# Altium PCB KEYPAD_OLED.PcbDoc
Units mil, origin at the board's own origin, x right, y up, seen from the top; angles counter-clockwise.
Board outline 4903.94 x 4427.17 mil, 2 copper layers (Top Layer, Bottom Layer), stack 59.4 mil thick; 21 components, 18 nets, 129 pads, 7 vias.
Unrouted connection lines stored in the file: 11.
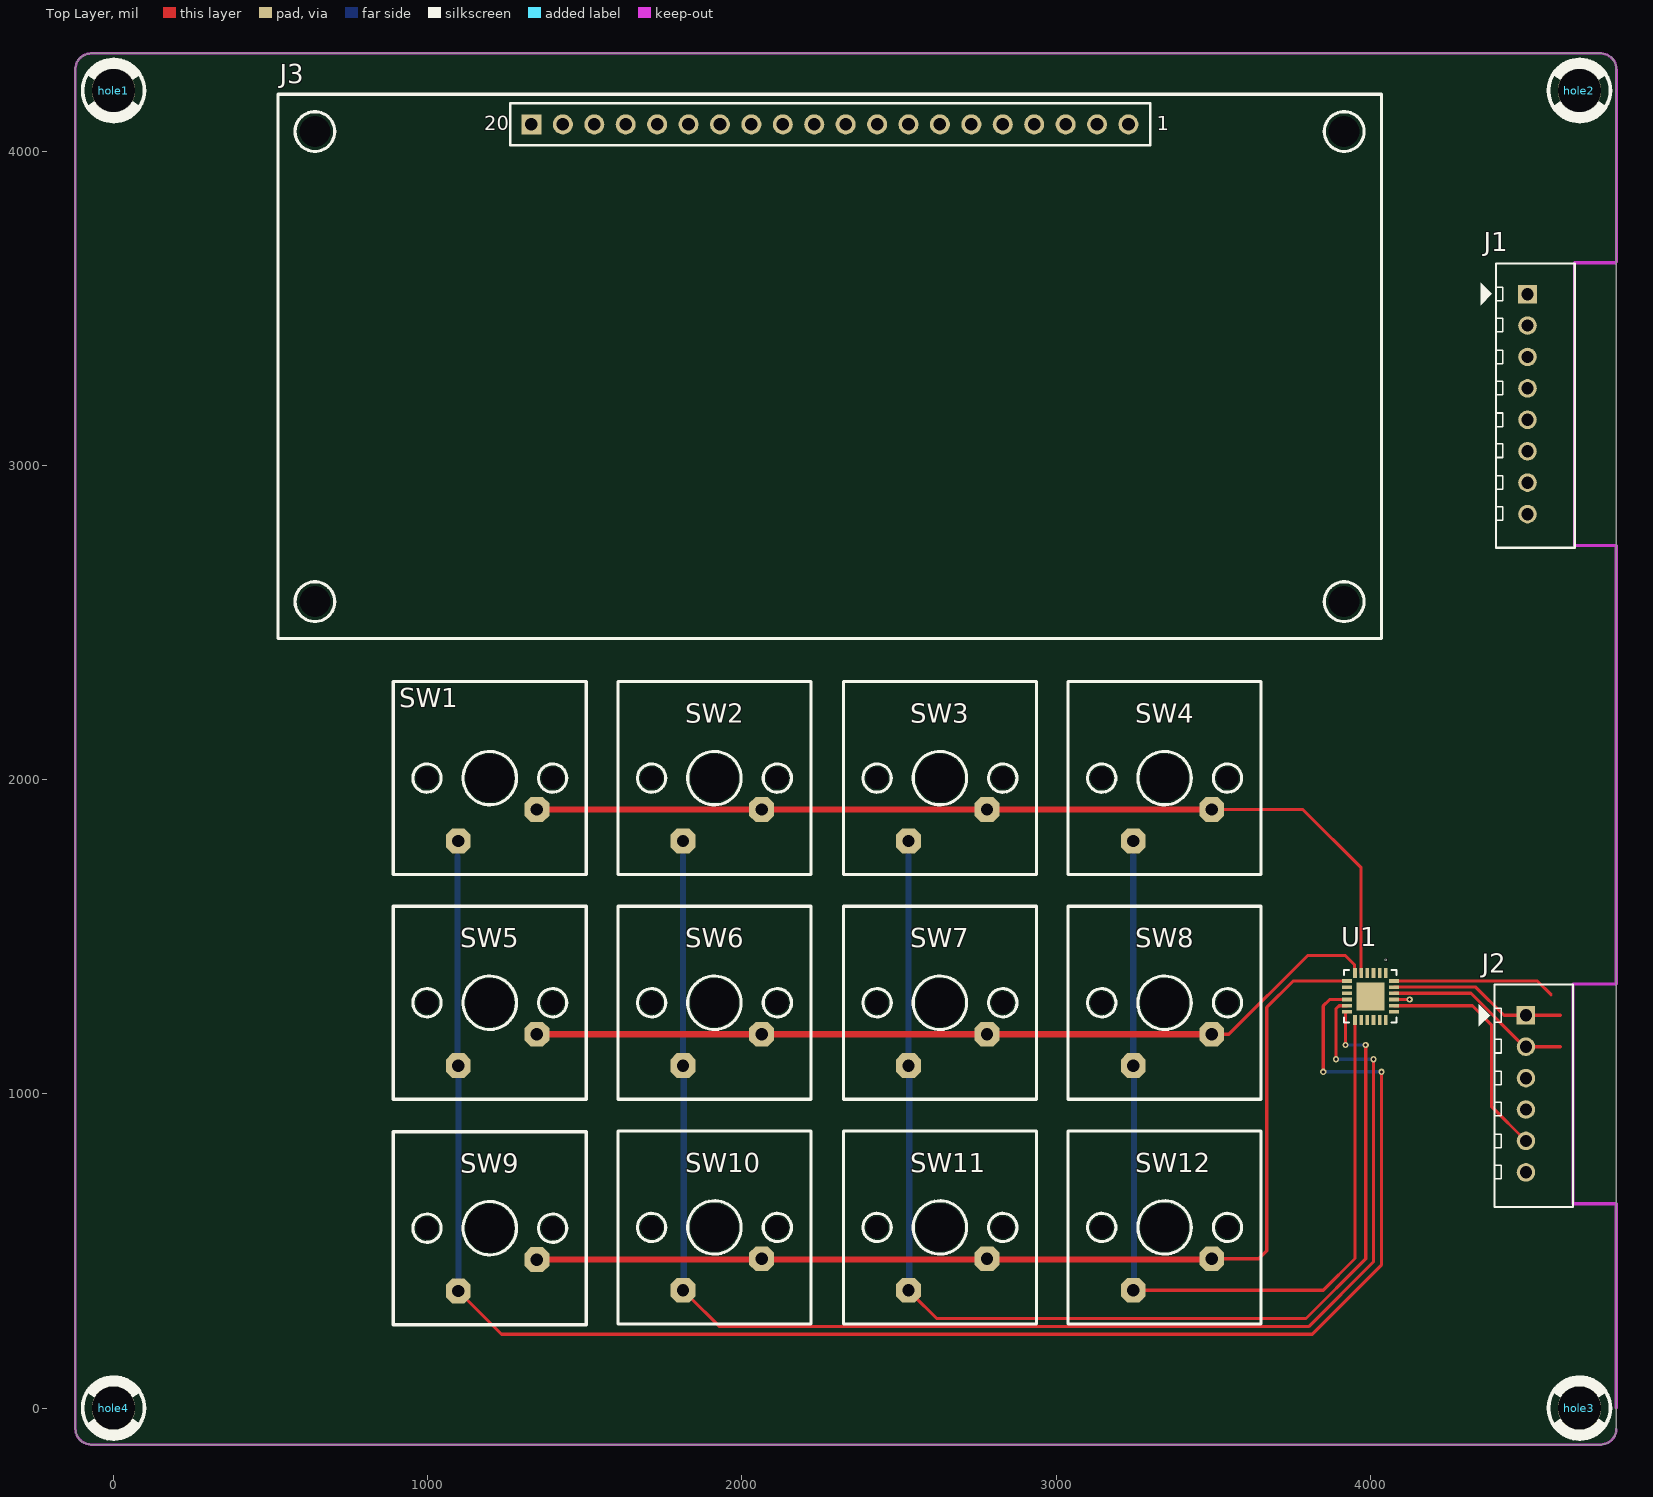
[diagram p0: Top Layer view]
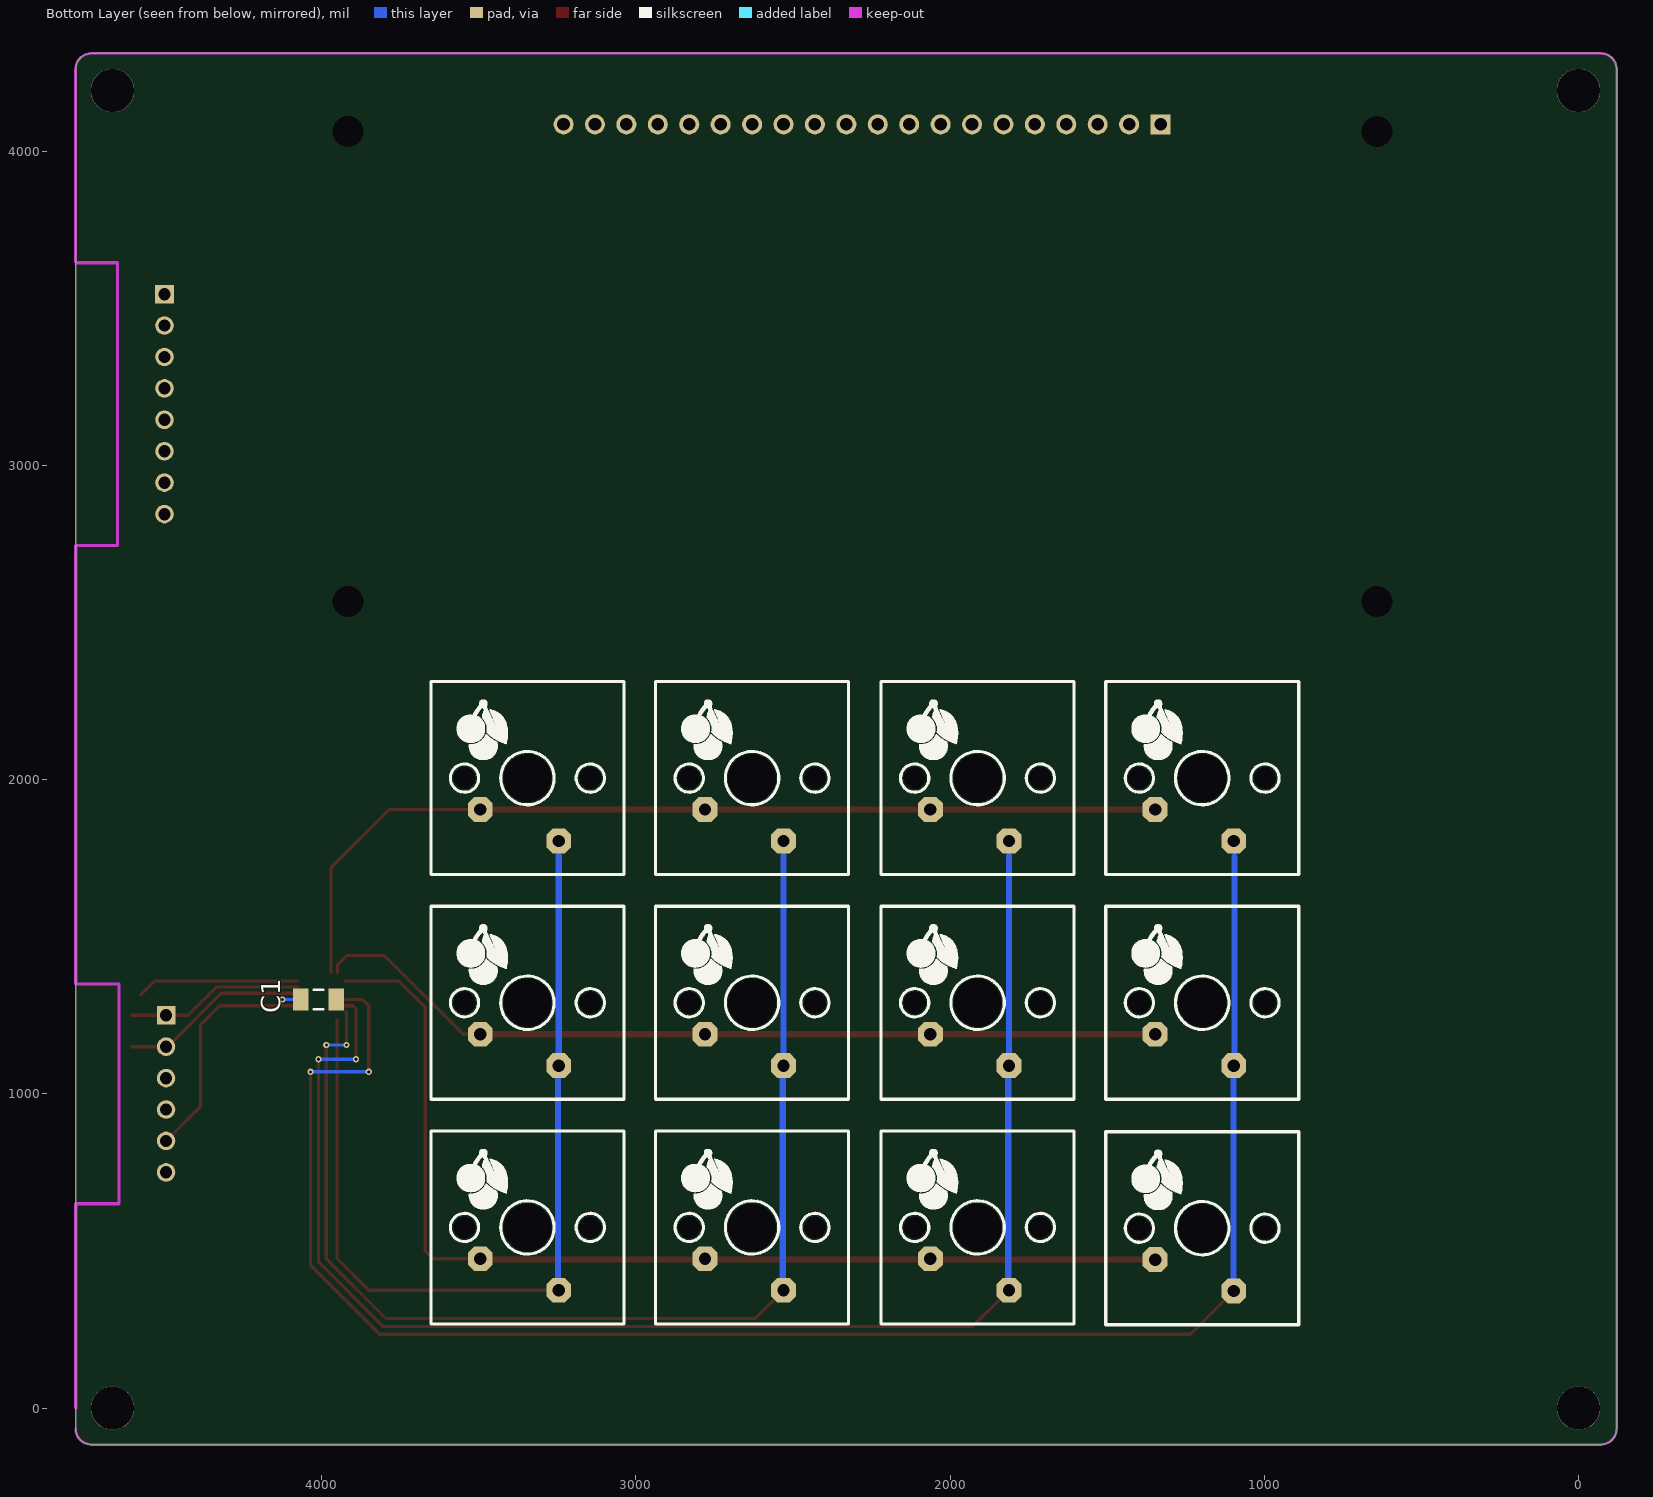
[diagram p1: Bottom Layer view, seen from below]

## Layer stack, top to bottom
Top Solder: solder mask 0.4, Solder Resist, Dk 3.5
Top Layer: signal copper 1.4
Dielectric 2: core 24, Core-038, Dk 4.6
Dielectric 1: prepreg 8.6, PP-023, Dk 4.5
Dielectric 3: core 24, Core-038, Dk 4.6
Bottom Layer: signal copper 1.4
Bottom Solder: solder mask 0.4, Solder Resist, Dk 3.5

## Board outline
-72.05,-116.14 cw(c-71.06,-65.94) -121.26,-64.96 -121.26,4261.81 cw(c-71.06,4260.83) -70.08,4311.02 4733.46,4311.02 cw(c4732.48,4260.83) 4782.68,4259.84 4782.68,-66.93 cw(c4732.48,-65.94) 4731.5,-116.14

## Design rules (kind name [scope] priority, off if disabled: settings)
Clearance [All] p1: gap=5 ignorepadtopadclearanceinfootprint=FALSE except(0: Arc-Hole Track-Hole SMDPad-Hole THPad-Hole Via-Hole Fill-Hole Poly-Hole Region-Hole Text-Hole)
PlaneConnect [All] p1: planeconnectstyle=Direct reliefexpansion=20 reliefentries=4 reliefconductorwidth=10 reliefairgap=10
PolygonConnect [All] p1: connectstyle=Direct reliefconductorwidth=10 reliefentries=4 polygonreliefangle="90 Angle" airgapwidth=10
RoutingVias [All] p1: holewidth=28 width=50 viastyle="Through Hole" minholewidth=9.84 minwidth=19.68 maxholewidth=28 maxwidth=50
SolderMaskExpansion [All] p1: expansion=4
Width [All] p1: maxlimit=39.37 minlimit=10 preferedwidth=19.68
29 further rules are at their usual default settings.

## Classes and differential pairs
component class OLED: J1 J3
component class KEYPAD: C1 hole1 hole2 hole3 hole4 J2 SW1 SW2 SW3 SW4 SW5 SW6 SW7 SW8 SW9 SW10 SW11 SW12 U1

## Components (designator, comment, footprint, x,y, rotation, side; value= is the part's Value field where it differs from the comment)
C1 "1UF" CAPC3216X16N 4010,1300 r0 bottom value=1uF
hole1 "Vit 3mm" "HOLE 3mm" 0,4192.91 r0 top
hole2 "Vit 3mm" "HOLE 3mm" 4665.35,4192.91 r0 top
hole3 "Vit 3mm" "HOLE 3mm" 4665.35,0 r0 top
hole4 "Vit 3mm" "HOLE 3mm" 0,0 r0 top
J1 "JP8" "CON8 -RA" 4500,3545 r270 top value="Connector 8"
J2 "Con6" "CON6 -RA" 4495,1250 r270 top value="Connector 5"
J3 "OLED" OLED 2280,3315 r0 top value="Connector 8"
SW1 "" cherry_sw 1197.5,2004.73 r0 top
SW2 "" cherry_sw 1912.5,2004.73 r0 top
SW3 "" cherry_sw 2630,2004.73 r0 top
SW4 "" cherry_sw 3345,2004.73 r0 top
SW5 "" cherry_sw 1197.5,1289.73 r0 top
SW6 "" cherry_sw 1912.5,1289.73 r0 top
SW7 "" cherry_sw 2630,1289.73 r0 top
SW8 "" cherry_sw 3345,1289.73 r0 top
SW9 "" cherry_sw 1197.5,572.36 r0 top
SW10 "" cherry_sw 1912.5,574.73 r0 top
SW11 "" cherry_sw 2630,574.73 r0 top
SW12 "" cherry_sw 3345,574.73 r0 top
U1 "ADP5588ACPZ-R7" CP_24_1_ADI 4000,1310 r270 top

## Footprints (in the part's own frame and the unit in brackets; to place one, negate y for a bottom-side part, rotate by r counter-clockwise, add the part's x,y. Pads: shape width x height; smd on the part's side, far side on the other; paste and mask are expansions set on the pad)
CAPC3216X16N [mm] "Chip Capacitor, 2-Leads, Body 3,20x1,60mm, IPC Medium Density"
  rect 1.25x1.75 smd: 1(-1.425,0) 2(1.425,0)
  silkscreen extent -0.4,-0.77 0.4,0.77, body extent -1.6,-0.8 1.6,0.8, height 1.6
cherry_sw [mm]
  round 0 hole 1.8 mask+0: 0(-5.08,0) 0(5.08,0)
  round 0 hole 3.9 mask+0: 0(0,0)
  oct 2x2 hole 1 mask+0: 1(3.81,-2.54) 2(-2.54,-5.08)
  silkscreen extent -7.8,-7.8 7.8,7.8, body extent -8.95,-8.95 8.95,8.95, height 16.5
"CON6 -RA" [mm] "CON8"
  rect 1.5x1.5 hole 1: 1(0,0)
  round 1.5 hole 1 mask+0: 2(2.54,0) 3(5.08,0) 4(7.62,0) 5(10.16,0) 6(12.7,0)
  silkscreen extent -2.48,-3.8 15.49,3.81, body extent -2.54,-0.06 15.24,7.14, height 5.95
"CON8 -RA" [mm] "CON8"
  rect 1.5x1.5 hole 1: 1(0,0)
  round 1.5 hole 1 mask+0: 2(2.54,0) 3(5.08,0) 4(7.62,0) 5(10.16,0) 6(12.7,0) 7(15.24,0) 8(17.78,0)
  silkscreen extent -2.48,-3.8 20.5,3.81, body extent -2.54,-0.06 20.32,7.14, height 5.95
CP_24_1_ADI [mm]
  rect 0.8x0.3 smd paste+0 mask+0: 1(-1.892,1.25) 2(-1.892,0.75) 3(-1.892,0.25) 4(-1.892,-0.25) 5(-1.892,-0.75) 6(-1.892,-1.25) 13(1.892,-1.25) 14(1.892,-0.75) 15(1.892,-0.25) 16(1.892,0.25) 17(1.892,0.75) 18(1.892,1.25)
  rect 0.3x0.8 smd paste+0 mask+0: 7(-1.25,-1.892) 8(-0.75,-1.892) 9(-0.25,-1.892) 10(0.25,-1.892) 11(0.75,-1.892) 12(1.25,-1.892) 19(1.25,1.892) 20(0.75,1.892) 21(0.25,1.892) 22(-0.25,1.892) 23(-0.75,1.892) 24(-1.25,1.892)
  rect 2.261x2.261 smd paste+0 mask+0: 25(0,0)
  silkscreen extent -2.12,-2.12 2.12,2.12, body extent -1.99,-1.99 1.99,1.99, height 0.99
"HOLE 3mm" [mm]
  round 3.5 hole 3.5 mask+0.05: 1(0,0)
  silkscreen extent -2.5,-2.5 2.5,2.5
OLED [mm]
  round 1.62 hole 1.02: 1(24.13,19.558) 2(21.59,19.558) 3(19.05,19.558) 4(16.51,19.558) 5(13.97,19.558) 6(11.43,19.558) 7(8.89,19.558) 8(6.35,19.558) 9(3.81,19.558) 10(1.27,19.558) 11(-1.27,19.558) 12(-3.81,19.558) 13(-6.35,19.558) 14(-8.89,19.558) 15(-11.43,19.558) 16(-13.97,19.558) 17(-16.51,19.558) 18(-19.05,19.558) 19(-21.59,19.558)
  rect 1.62x1.62 hole 1.02: 20(-24.13,19.558)
  round 1.62 hole 2.5: 21(-41.634,-19.016) 21(-41.634,18.984) 21(41.566,-19.016) 21(41.566,18.984)
  silkscreen extent -44.6,-22 44.6,22, body extent -44.6,-22 44.6,22, height 14.5

## Part data
C1: library part "Cap Semi", "AP CER 100UF 6.3V 20% X5R 1210"
J1: library part Con8, "Connector 8"
J2: "Connector 5"
SW1 SW2 SW3 SW4 SW5 SW6 SW7 SW8 SW9 SW10 SW11 SW12: library part SW
U1: "No Description Available", Built_By=EMA_UL_Team, Copyright="Copyright (C) 2021 Accelerated Designs. All rights reserved", Manufacturer_Part_Number=ADP5588ACPZ-R7, RefDes=RefDes, SourceLibrary=Analog_2012-01-01_8, Type=DEV, VENDOR="Analog Devices Inc"

## Via types
v1: diameter 19.68, hole 9.84, Top Layer to Bottom Layer, 7 vias

## Nets (pads, with @x,y where several pads share a name; then routed paths per layer and width w, separated by ;. In a path a pad name is that pad's centre, name@x,y a point inside that pad or via, vN(x,y) a via of type N, cw(c..) or ccw(c..) an arc to the next point about the centre after c; other vN are vias at no path point)
GND: C1.1 hole1.1 hole2.1 hole3.1 hole4.1 J1.4 J1.8 J2.3 U1.19
KEYPAD_nINTR: J2.4 U1.24 | length 518.8
  Top Layer w10: U1.24 4530.79,1359.21 4575,1315
KEYPAD_nRST: J2.5 U1.20 | length 751.1
  Top Layer w10: U1.20 4074.81,1280.16 4324.84,1280.16 4385,1220 4385,960 J2.5
KEYPAD_SCL: J2.1 U1.23 | length 568
  Top Layer w10: U1.23 4075,1340 4075.47,1339.53 4335.47,1339.53 4425,1250 J2.1 4605,1250
KEYPAD_SDA: J2.2 U1.22 | length 600.9
  Top Layer w10: U1.22 4320.16,1319.84 4490,1150 4605,1150
NetSW1_1: SW1.1 SW2.1 SW3.1 SW4.1 U1.5 | length 3035.2
  Top Layer w10: SW4.1@3495,1905 3495.27,1905 3785,1905 3970.47,1719.53 U1.5
  Top Layer w19.68: SW1.1 SW2.1 SW3.1 SW4.1 SW4.1@3495.27,1905
NetSW1_2: SW1.2 SW5.2 SW9.2 U1.10 | length 5613.8
  Top Layer w10: SW9.2 1234.86,235 3815,235 4035,455 v1(4035,1070) ; v1(3850,1070) 3850,1280 3870.16,1300.16 U1.10
  Bottom Layer w10: 1095,1755 1095,1802.23 SW1.2 ; v1(3850,1070) v1(4035,1070)
  Bottom Layer w19.68: 1095,1755 1095,1092.23 SW5.2 SW9.2
NetSW2_2: SW2.2 SW6.2 SW10.2 U1.11 | length 4679.1
  Top Layer w10: SW10.2 1812.5,367.5 1825,355 1832.23,355 1927.23,260 3805,260 4010,465 v1(4010,1110) ; v1(3890,1110) 3890,1270 3900.47,1280.47 U1.11
  Bottom Layer w10: v1(3890,1110) v1(4010,1110)
  Bottom Layer w19.68: SW6.2@1812.5,1094.73 1812.5,1757.5 ; SW10.2@1815,374.86 SW6.2@1815,1092.23
NetSW3_2: SW3.2 SW7.2 SW11.2 U1.12 | length 3841.6
  Top Layer w10: SW11.2 2545.27,374.73 2545.27,359.46 2619.73,285 3795,285 3985,475 v1(3985,1155) ; v1(3920.45,1155.45) 3920.91,1155.91 3920.91,1260.79 U1.12
  Top Layer w19.68: SW11.2@2545.27,374.73 2555,365 2555,363.65 SW11.2@2559.53,359.12
  Bottom Layer w10: v1(3920.45,1155.45) 3984.55,1155.45 v1(3985,1155)
  Bottom Layer w19.68: SW11.2 SW11.2@2535.27,374.73 ; SW7.2@2530,1094.73 2530,1757.5 ; SW11.2@2532.5,374.86 SW7.2@2532.5,1092.23
NetSW4_2: SW4.2 SW8.2 SW12.2 U1.13 | length 2945.2
  Top Layer w10: SW12.2@3255,370 3255,364.73 3265.27,375 3850,375 3950.79,475.79 U1.13 U1.13@3950,1234.71
  Top Layer w19.68: SW12.2 3250.27,374.73 SW12.2@3255,370
  Bottom Layer w19.68: SW12.2 3245,355 3250,350 3252.16,352.16 SW12.2@3267.57,352.16 ; SW8.2@3245,1094.73 3245,1757.5 ; SW12.2@3247.5,374.86 SW8.2@3247.5,1092.23
NetSW5_1: SW5.1 SW6.1 SW7.1 SW8.1 U1.6 | length 2744.4
  Top Layer w10: SW8.1 3549.73,1189.73 3800,1440 3920,1440 3949.88,1410.12 3949.88,1385.41 U1.6
  Top Layer w19.68: SW5.1 SW6.1 SW7.1 SW8.1
NetSW9_1: SW9.1 SW10.1 SW11.1 SW12.1 U1.7 | length 3398.3
  Top Layer w10: SW12.1@3520,475 3645,475 3670,500 3670,1275 3754.21,1359.21 U1.7
  Top Layer w19.68: SW9.1 2780,472.36 SW12.1@3495,472.36 ; SW12.1 3519.73,474.73 SW12.1@3520,475
OLED_GPIO_0_3V3: J1.6
OLED_GPIO_1_3V3: J1.7
OLED_MOSI_3V3: J1.2
OLED_nCS_3V3: J1.5
OLED_SCK_3V3: J1.3
VCC3V3: C1.2 J1.1 J2.6 U1.21 | length 109.5
  Top Layer w10: U1.21 4079.84,1300.16 4080,1300 v1(4125,1300)
  Bottom Layer w10: C1.2 v1(4125,1300)
pads on no net: J3.1 J3.2 J3.3 J3.4 J3.5 J3.6 J3.7 J3.8 J3.9 J3.10 J3.11 J3.12 J3.13 J3.14 J3.15 J3.16 J3.17 J3.18 J3.19 J3.20 J3.21 SW1.0 SW2.0 SW3.0 SW4.0 SW5.0 SW6.0 SW7.0 SW8.0 SW9.0 SW10.0 SW11.0 SW12.0 U1.1 U1.2 U1.3 U1.4 U1.8 U1.9 U1.14 U1.15 U1.16 U1.17 U1.18 U1.25

## Keep-outs
Keep-Out Layer:
  lines w7.87: 4782.68,-66.93 cw(c4732.48,-65.94) 4731.5,-116.14 -72.05,-116.14 cw(c-71.06,-65.94) -121.26,-64.96 -121.26,4261.81 cw(c-71.06,4260.83) -70.08,4311.02 4733.46,4311.02 cw(c4732.48,4260.83) 4782.68,4259.84
  lines w10: 4782.5,0 4782.5,650 4645,650 4645,1350 4782.5,1350 4782.5,2745 4650,2745 4650,3645 4780.35,3645 4782.68,3647.32 4782.68,4259.84

## Other copper
Bottom Layer:
  pour cut-out: 4783.46,-118.11

## Text inside footprints (layer, text, board x,y; h text height)
J3: Top Overlay "1" at 3320,4050 h77.5; Top Overlay "20" at 1180,4050.86 h77.5
U1: Top Overlay "o" at 4045,1430 h10 r270; Mechanical 13 "*" at 4034.06,1381 h50 r270